# EAGLE board Lamp Logic Board_3 (EAGLE 9.4.2)
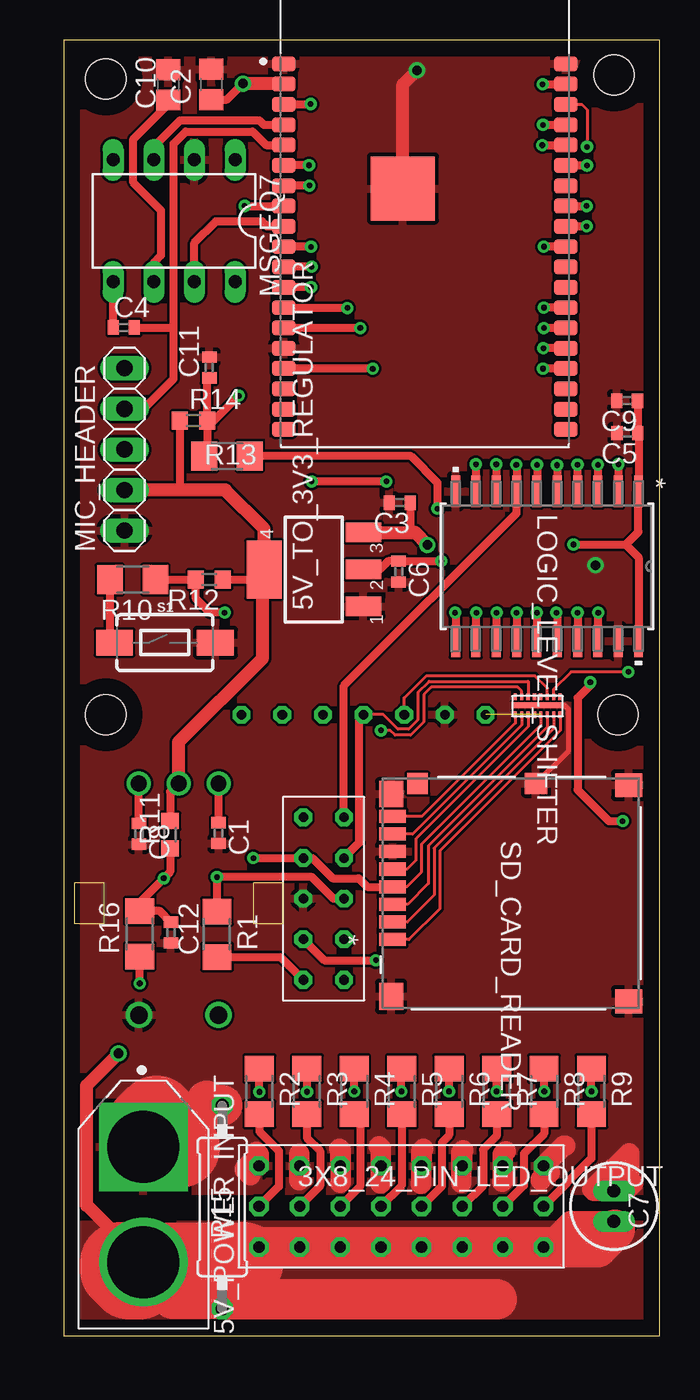
[diagram p0: board, top side]
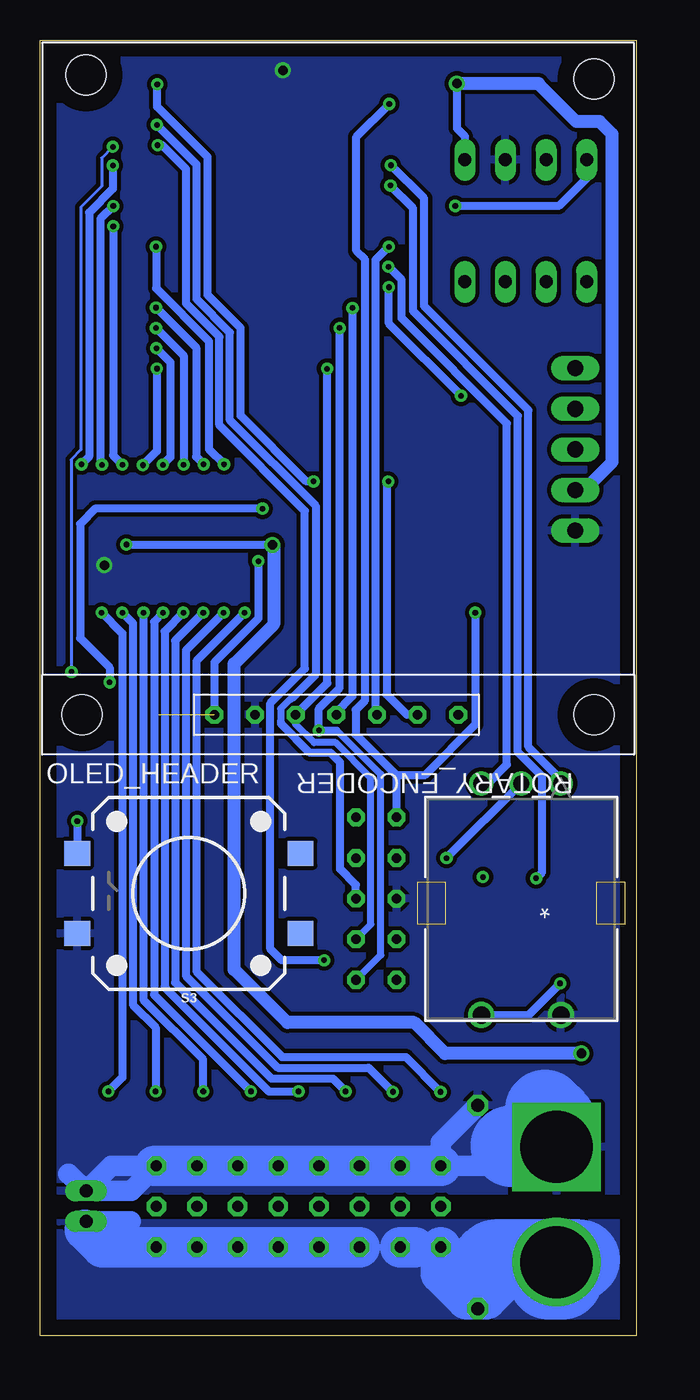
[diagram p1: board, bottom side, seen from below]

Size 37.25 x 81 mm. Coordinates in mm from the lower left corner, seen from the top.
Outline: 0,0 37.25,0 37.25,81 0,81 0,0
Copper layers (1*16): Top 0.035mm / dielectric 1.5mm / Bottom 0.035mm
Design rules "default": minimum track width 6mil, minimum drill 0.35mm, track to track 6mil, track to pad 6mil, pad to pad 6mil, via to via 6mil, smd to smd 6mil, copper to edge 40mil, drill to drill 6mil, minimum pad ring 10mil, minimum via ring 8mil, stop-mask expansion 4mil, vias tented up to drill 0mil, thermal gap 10mil

## Footprints (pad centres in the part's own frame; a part is rotated, then mirrored left to right if it is on the bottom)
3X8PINHEAD = drill 0.7 octagon: 1 0,0; 2 2.54,0; 3 5.08,0; 4 7.62,0; 5 10.16,0; 6 12.7,0; 7 15.24,0; 8 17.78,0; 9 0,-2.54; 10 2.54,-2.54; 11 5.08,-2.54; 12 7.62,-2.54; 13 10.16,-2.54; 14 12.7,-2.54; 15 15.24,-2.54; 16 17.78,-2.54; 17 0,-5.08; 18 2.54,-5.08; 19 5.08,-5.08; 20 7.62,-5.08; 21 10.16,-5.08; 22 12.7,-5.08; 23 15.24,-5.08; 24 17.78,-5.08
AMASS_XT60-M = drill 4.5 square: 1 -3.6,0 | drill 4.5: 2 3.6,0
SOT223 = smd 1.219 x 2.235: 1 -2.311,-3.099; 2 0,-3.099; 3 2.311,-3.099 | smd 3.6 x 2.2: 4 0,3.099
C0402 = smd 0.7 x 0.9: 1 -0.65,0; 2 0.65,0
C0805 = smd 1.3 x 1.5: 1 -0.95,0; 2 0.95,0
ENP2,0-5 = drill 0.813 pad 1.27 long: 1 -0.953,0; 2 0.953,0
DW20 = smd 1.981 x 0.559: 1 -4.686,5.715; 2 -4.686,4.445; 3 -4.686,3.175; 4 -4.686,1.905; 5 -4.686,0.635; 6 -4.686,-0.635; 7 -4.686,-1.905; 8 -4.686,-3.175; 9 -4.686,-4.445; 10 -4.686,-5.715; 11 4.686,-5.715; 12 4.686,-4.445; 13 4.686,-3.175; 14 4.686,-1.905; 15 4.686,-0.635; 16 4.686,0.635; 17 4.686,1.905; 18 4.686,3.175; 19 4.686,4.445; 20 4.686,5.715
1X05 = drill 1.016 long: 1 -5.08,0; 2 -2.54,0; 3 0,0; 4 2.54,0; 5 5.08,0
DIL-08 = drill 0.813 long: 1 -3.81,-3.81; 2 -1.27,-3.81; 3 1.27,-3.81; 4 3.81,-3.81; 5 3.81,3.81; 6 1.27,3.81; 7 -1.27,3.81; 8 -3.81,3.81
SPIOLED_STADOFF = drill 0.6 octagon: CLK 18.39,2.5; CS 20.93,2.5; DC 23.47,2.5; DIN 15.85,2.5; GND 13.31,2.5; RST 26.01,2.5; VCC 10.77,2.5 | hole 2.5: 2.5,2.5; 34.5,2.5; 34.5,42.25; 2.75,42.5
R1206 = smd 1.6 x 1.803: 1 -1.422,0; 2 1.422,0
R0603 = smd 1 x 1.1: 1 -0.85,0; 2 0.85,0
0309/12 = drill 0.813 octagon: 1 -6.35,0; 2 6.35,0
EN11-HSM = drill 0.991 pad 1.499: 1 -2.489,7.874; 2 2.489,7.874; 3 0,7.874 | drill 1.092 pad 1.6: 4 -2.489,22.352; 5 2.489,22.352
TACTILE_SWITCH_SMD_6.0X3.5MM = smd 2.3 x 1.6: 1 -3.15,0; 2 3.15,0
TACTILE_SWITCH_SMD_12MM = smd 1.6 x 1.55: 1 6.975,-2.5; 2 -6.975,-2.5; 3 6.975,2.5; 4 -6.975,2.5
CM1624-08DE = smd 0.2 x 0.4: CLK 1,0; CMD 2.2,0; DATA0 0.6,0; DATA1 0.2,0; DATA2 3,0; DATA3 2.6,0; ESD1 1.4,0; ESD2 1.4,1.125; ESD3 1.775,1.125; SDCLK 1,1.125; SDCMD 2.2,1.125; SDDATA0 0.6,1.125; SDDATA1 0.2,1.125; SDDATA2 3,1.125; SDDATA3 2.6,1.125; VCC 1.8,0 | smd 3 x 0.35: GND 1.575,0.575
CON00218_8 = smd 0.813 x 1.676: 1 2.899,-7.387; 2 1.799,-7.387; 3 0.699,-7.387; 4 -0.401,-7.387; 5 -1.501,-7.387; 6 -2.601,-7.387; 7 -3.701,-7.387; 8 -4.801,-7.387 | smd 1.499 x 1.702: 9 -6.751,7.374; 10 6.751,7.374 | smd 1.295 x 1.397: 11 -6.859,1.577 | smd 1.295 x 1.295: 12 -6.859,-5.823 | smd 1.6 x 1.499: 13 -6.201,-7.476 | smd 1.702 x 1.499: 14 6.449,-7.476
2X6PINHEAD = drill 0.6 octagon: CS 6.35,3.81; DTR 1.27,1.27; GND 6.35,1.27; MISO 11.43,3.81; MOSI 8.89,3.81; RTS 1.27,3.81; RX0 8.89,1.27; SCK 3.81,3.81; TX0 11.43,1.27; VCC 3.81,1.27
XCVR_ESP32-WROVER-I = smd 1.45 x 0.93: 1 -8.81,8.26; 2 -8.81,6.99; 3 -8.81,5.72; 4 -8.81,4.45; 5 -8.81,3.18; 6 -8.81,1.91; 7 -8.81,0.64; 8 -8.81,-0.63; 9 -8.81,-1.9; 10 -8.81,-3.17; 11 -8.81,-4.44; 12 -8.81,-5.71; 13 -8.81,-6.98; 14 -8.81,-8.25; 15 -8.81,-9.52; 16 -8.81,-10.79; 17 -8.81,-12.06; 18 -8.81,-13.33; 19 -8.81,-14.6; 20 8.81,-14.6; 21 8.81,-13.33; 22 8.81,-12.06; 23 8.81,-10.79; 24 8.81,-9.52; 25 8.81,-8.25; 26 8.81,-6.98; 27 8.81,-5.71; 28 8.81,-4.44; 29 8.81,-3.17; 30 8.81,-1.9; 31 8.81,-0.63; 32 8.81,0.64; 33 8.81,1.91; 34 8.81,3.18; 35 8.81,4.45; 36 8.81,5.72; 37 8.81,6.99; 38 8.81,8.26 | smd 4 x 4: 39 -1.38,0.47

## Placement (x,y rotation side)
3X8_24_PIN_LED_OUTPUT  3X8PINHEAD  [3X8PINHEAD]  12.2,10.62 0 top
5V_POWER_INPUT  XT60-M  [AMASS_XT60-M]  4.97,8.2 270 top
5V_TO_3V3_REGULATOR  [SOT223]  15.62,47.9 90 top
C1  0.01uF  [C0402]  9.68,31.43 270 top
C2  0.1uF  [C0805]  9.22,78.22 90 top
C3  1uF  [C0402]  21,52.08 180 top
C4  0.01uF  [C0402]  3.75,63.02 0 top
C5  100nF  [C0402]  35.23,56.42 180 top
C6  1uF  [C0402]  20.93,47.77 270 top
C7  1000uF  [ENP2,0-5]  34.38,8.1 270 top
C8  0.01uF  [C0402]  4.7,31.38 270 top
C9  1uF  [C0402]  35.2,58.45 180 top
C10  0.1uF  [C0805]  6.53,78.2 90 top
C11  100nF  [C0402]  9.1,60.52 90 top
C12  100nF  [C0402]  6.7,25.2 90 top
LOGIC_LEVEL_SHIFTER  SN74HCT245DWR  [DW20]  30.2,48.1 270 top
MIC_HEADER  [1X05]  3.8,55.41 90 top
MSGEQ7  MSGEQ7DIL  [DIL-08]  6.89,69.69 180 top
OLED_HEADER  SPIOLED_STANDOFF  [SPIOLED_STADOFF]  37.12,36.33 0 bottom
R1  330  [R1206]  9.57,25.1 270 top
R2  330  [R1206]  12.22,15.28 270 top
R3  330  [R1206]  15.19,15.28 270 top
R4  330  [R1206]  18.15,15.28 270 top
R5  330  [R1206]  21.12,15.28 270 top
R6  330  [R1206]  24.08,15.28 270 top
R7  330  [R1206]  27.05,15.28 270 top
R8  330  [R1206]  30.01,15.28 270 top
R9  330  [R1206]  32.97,15.28 270 top
R10  330  [R1206]  4.3,47.27 180 top
R11  [R0603]  6.65,31.32 90 top
R12  12k  [R0603]  9.1,47.27 180 top
R13  330  [R1206]  10.2,55 0 top
R14  12k  [R0603]  8.11,57.2 0 top
R15  75k  [0309/12]  9.9,8.05 270 top
R16  330  [R1206]  4.75,25.12 90 top
ROTARY_ENCODER  EN11-HSM1AF15  [EN11-HSM]  7.18,42.41 180 bottom
S1  [TACTILE_SWITCH_SMD_6.0X3.5MM]  6.33,43.33 0 top
S3  MOMENTARY-SWITCH-SPST-SMD-12MM  [TACTILE_SWITCH_SMD_12MM]  27.95,27.65 180 bottom
SD_CARD_FILTER  CM1624-08DE  [CM1624-08DE]  28.02,38.83 0 top
SD_CARD_READER  LLC  [CON00218_8]  27.93,27.66 270 top
SERIAL/SPI_HEADER  2X6PINHEAD  [2X6PINHEAD]  13.7,33.67 270 top
U1  ESP32-WROVER-IB  [XCVR_ESP32-WROVER-I]  22.57,71.25 0 top

## Library data of the parts
3X8_24_PIN_LED_OUTPUT = 3X8PINHEAD
5V_POWER_INPUT = XT60-M; AVAILABILITY: Unavailable; MF: AMASS; MP: XT60-M; PACKAGE: Package Analog Devices; PRICE: None
5V_TO_3V3_REGULATOR = lm1117; MF: Texas Instruments; MPN: LM1117MP-1.8; OC_FARNELL: 1469053; OC_NEWARK: 41K3467
C1-C6 C8-C12 R1-R16 = resistor
C7 = cap-pan40
LOGIC_LEVEL_SHIFTER = SN74HCT245DWR ; MANUFACTURER_PART_NUMBER: SN74HCT245DWR; VENDOR: Texas Instruments
MIC_HEADER = pinhead
MSGEQ7 = MSGEQ7; DESCRIPTION: Seven Band Graphic Equalizer Display Filter; DIGI-KEY_PART_NUMBER: 1568-1544-ND; DIGI-KEY_PURCHASE_URL: https://www.digikey.com/product-detail/en/sparkfun-electronics/DEV-13116/1568-1544-ND/5764478?utm_source=snapeda&utm_medium=aggregator&utm_campaign=symbol; MF: SparkFun Electronics; MP: MSGEQ7; PACKAGE: SOIC-8 Mixed Signal Integration
OLED_HEADER = SPIOLED-STANDOFF
ROTARY_ENCODER = untitled
S1 = SparkFun-Switches; PROD_ID: SWCH-00815; SF_SKU: COM-08229
S3 = SparkFun-Switches; PROD_ID: SWCH-11967; SF_SKU: COM-12993
SD_CARD_FILTER = CM1624-08DE
SD_CARD_READER = 5027740891; MANUFACTURER_PART_NUMBER: LLC; VENDOR: Molex Connector Corporation
SERIAL/SPI_HEADER = 2X4PINHEAD
U1 = ESP32-WROVER-I; AVAILABILITY: Unavailable; DESCRIPTION: Module: combo; GPIO, I2C x2, I2S x2, SDIO, SPI x3, UART x3; U.FL; MF: Espressif Systems; MP: ESP32-WROVER-I; PACKAGE: Module Espressif Systems; PRICE: None

## Nets
AR: MIC_HEADER.5
BEST_BUTTON: C11.1 R13.1 R14.2 U1.12
EN: R10.1 R12.2 SERIAL/SPI_HEADER.DTR U1.3
GAIN: MIC_HEADER.3
GND: 3X8_24_PIN_LED_OUTPUT.1 3X8_24_PIN_LED_OUTPUT.2 3X8_24_PIN_LED_OUTPUT.3 3X8_24_PIN_LED_OUTPUT.4 3X8_24_PIN_LED_OUTPUT.5 3X8_24_PIN_LED_OUTPUT.6 3X8_24_PIN_LED_OUTPUT.7 3X8_24_PIN_LED_OUTPUT.8 5V_POWER_INPUT.1 5V_TO_3V3_REGULATOR.1 C1.2 C2.2 C3.2 C5.2 C6.2 C7.1 C8.2 C9.2 C10.2 C11.2 C12.1 LOGIC_LEVEL_SHIFTER.10 LOGIC_LEVEL_SHIFTER.19 MIC_HEADER.1 MSGEQ7.2 OLED_HEADER.GND R15.1 ROTARY_ENCODER.4 S1.2 S3.3 SD_CARD_FILTER.GND SD_CARD_READER.6 SD_CARD_READER.9 SD_CARD_READER.10 SD_CARD_READER.11 SD_CARD_READER.13 SD_CARD_READER.14 SERIAL/SPI_HEADER.GND U1.1 U1.15 U1.38 U1.39
HEADER_CS: R1.1 SERIAL/SPI_HEADER.CS U1.35
LEDS1_3V3: LOGIC_LEVEL_SHIFTER.2 U1.33
LEDS1_5V: 3X8_24_PIN_LED_OUTPUT.9 R2.2
LEDS2_3V3: LOGIC_LEVEL_SHIFTER.3 U1.31
LEDS2_5V: 3X8_24_PIN_LED_OUTPUT.10 R3.2
LEDS3_3V3: LOGIC_LEVEL_SHIFTER.4 U1.30
LEDS3_5V: 3X8_24_PIN_LED_OUTPUT.11 R4.2
LEDS4_3V3: LOGIC_LEVEL_SHIFTER.5 U1.23
LEDS4_5V: 3X8_24_PIN_LED_OUTPUT.12 R5.2
LEDS5_3V3: LOGIC_LEVEL_SHIFTER.6 U1.24
LEDS5_5V: 3X8_24_PIN_LED_OUTPUT.13 R6.2
LEDS6_3V3: LOGIC_LEVEL_SHIFTER.7 SERIAL/SPI_HEADER.RTS U1.25
LEDS6_5V: 3X8_24_PIN_LED_OUTPUT.14 R7.2
LEDS7_3V3: LOGIC_LEVEL_SHIFTER.8 U1.26
LEDS7_5V: 3X8_24_PIN_LED_OUTPUT.15 R8.2
LEDS8_3V3: LOGIC_LEVEL_SHIFTER.9 U1.29
LEDS8_5V: 3X8_24_PIN_LED_OUTPUT.16 R9.2
MIC: C4.2 MIC_HEADER.4 U1.5
MISO: SD_CARD_FILTER.SDDATA0 SERIAL/SPI_HEADER.MISO U1.14
MOSI: OLED_HEADER.DIN SD_CARD_FILTER.SDCMD SERIAL/SPI_HEADER.MOSI U1.16
MSGEQ_OUT: MSGEQ7.3 U1.4
MSGEQ_RST: MSGEQ7.7 U1.9
MSGEQ_STROBE: MSGEQ7.4 U1.8
N$1: LOGIC_LEVEL_SHIFTER.18 R9.1
N$3: C4.1 MSGEQ7.5
N$4: C10.1 MSGEQ7.6
N$5: R16.1 ROTARY_ENCODER.5
N$6: LOGIC_LEVEL_SHIFTER.17 R8.1
N$7: R13.2 S3.1
N$8: SD_CARD_FILTER.ESD1
N$9: R10.2 S1.1
N$10: LOGIC_LEVEL_SHIFTER.16 R7.1
N$11: LOGIC_LEVEL_SHIFTER.15 R6.1
N$12: LOGIC_LEVEL_SHIFTER.14 R5.1
N$13: LOGIC_LEVEL_SHIFTER.13 R4.1
N$14: LOGIC_LEVEL_SHIFTER.12 R3.1
N$15: LOGIC_LEVEL_SHIFTER.11 R2.1
OLED_CS: OLED_HEADER.CS U1.10
OLED_DC: OLED_HEADER.DC U1.37
OLED_RESET: OLED_HEADER.RST
ROTARY_BUTTON_OUT: C12.2 R11.1 R16.2 U1.7
ROTARY_OUT_A: C8.1 ROTARY_ENCODER.1 U1.6
ROTARY_OUT_B: C1.1 ROTARY_ENCODER.2 U1.11
RX0: SERIAL/SPI_HEADER.RX0 U1.34
SCK: OLED_HEADER.CLK SD_CARD_FILTER.SDCLK SERIAL/SPI_HEADER.SCK U1.13
SD_CMD: SD_CARD_FILTER.CMD SD_CARD_READER.3
SD_CS: SD_CARD_FILTER.SDDATA3 U1.36
SD_D0: SD_CARD_FILTER.DATA0 SD_CARD_READER.7
SD_D1: SD_CARD_FILTER.DATA1 SD_CARD_READER.8
SD_D2: SD_CARD_FILTER.DATA2 SD_CARD_READER.1
SD_D3: SD_CARD_FILTER.DATA3 SD_CARD_READER.2
SD_SCK: SD_CARD_FILTER.CLK SD_CARD_READER.5
TX0: R1.2 SERIAL/SPI_HEADER.TX0
VDD3V3: 5V_TO_3V3_REGULATOR.2 5V_TO_3V3_REGULATOR.4 C2.1 C6.1 MIC_HEADER.2 MSGEQ7.1 OLED_HEADER.VCC R11.2 R12.1 R14.1 ROTARY_ENCODER.3 SD_CARD_FILTER.VCC SD_CARD_READER.4 SERIAL/SPI_HEADER.VCC U1.2
VDD5V: 3X8_24_PIN_LED_OUTPUT.17 3X8_24_PIN_LED_OUTPUT.18 3X8_24_PIN_LED_OUTPUT.19 3X8_24_PIN_LED_OUTPUT.20 3X8_24_PIN_LED_OUTPUT.21 3X8_24_PIN_LED_OUTPUT.22 3X8_24_PIN_LED_OUTPUT.23 3X8_24_PIN_LED_OUTPUT.24 5V_POWER_INPUT.2 5V_TO_3V3_REGULATOR.3 C3.1 C5.1 C7.2 C9.1 LOGIC_LEVEL_SHIFTER.1 LOGIC_LEVEL_SHIFTER.20 R15.2

## Tracks (layer width: path | path; a pad name or v marks a point on that pad's centre or on a via)
BEST_BUTTON  (via drill 0.35)
  Top 0.508: v15.45,65.55 v15.44,65.54 U1.12 | R14.2 8.96,55.18 R13.1 | R14.2 9.38,57.2 v10.94,58.76 | R14.2 8.96,59.73 C11.1
  Bottom 0.508: v10.94,58.76 15.45,63.27 v15.45,65.55
EN  (via drill 0.35)
  Top 0.508: U1.3 15.39,76.97 v15.43,77 | R10.1 R12.2 8.25,46.08 9.12,45.2 v10.05,45.2
  Bottom 0.508: 14.97,35.03 SERIAL/SPI_HEADER.DTR 14.95,32.41 | 14.97,35.03 17.52,37.59 17.52,39.12 16.93,39.72 16.93,67.25 17.48,67.8 17.48,74.95 v15.43,77 | v10.05,45.2 10.05,38.2 13.22,35.03 14.97,35.03
GND  (via drill 0.6)
  Top 0.305: 30,35.02 SD_CARD_READER.11 31.55,36.56 31.55,39.16 31.3,39.41 SD_CARD_FILTER.GND 29.61,39.38
  Top 0.813: U1.39 21.18,78.21 v22.07,79.1
  Top 1.27: 12.04,11.49 12.2,11.33 3X8_24_PIN_LED_OUTPUT.1 11.47,10.62 11.3,10.45 11.3,10.38 11.65,10.03 | 3X8_24_PIN_LED_OUTPUT.3 17.28,11.64 | 17.28,11.64 17.23,11.7 | 3X8_24_PIN_LED_OUTPUT.4 19.82,11.71 | 19.82,11.71 19.68,11.85 | 3X8_24_PIN_LED_OUTPUT.5 22.36,11.59 | 22.36,11.59 22.45,11.68 | 3X8_24_PIN_LED_OUTPUT.6 24.9,11.55 | 24.95,11.6 24.9,11.55 | 27.62,11.53 27.44,11.34 3X8_24_PIN_LED_OUTPUT.7 27.44,9.66 27.4,9.62 | 3X8_24_PIN_LED_OUTPUT.8 31.23,11.88 31.35,11.88 | 3X8_24_PIN_LED_OUTPUT.8 30.38,10.23 30.38,10.18 | 3X8_24_PIN_LED_OUTPUT.8 29.98,9.96 29.79,9.77 29.79,9.72 | C7.1 35.35,10.03 35.35,11.4 34.38,10.43 34.27,10.43 33.01,9.16 33.12,9.05 C7.1 | 3X8_24_PIN_LED_OUTPUT.2 14.72,10.61 | 14.72,9.72 14.72,10.61 | 14.72,11.38 14.72,10.61 | 17.28,11.64 17.3,11.62 17.3,9.58 17.27,9.55 | 19.82,11.71 19.8,11.69 19.8,9.54 19.78,9.52 | 22.36,11.59 22.32,11.55 22.32,9.52 22.31,9.51 | 24.9,11.55 24.82,11.47 24.82,9.57 | C7.1 35.13,9.05 35.6,9.53
  Top 2.54: R15.1 9.22,14.4 8.95,14.68
  Top 5: 7.25,11.75 7.2,11.8 5V_POWER_INPUT.1 4.97,12.95 5.8,13.78
  Bottom 1.27: 3X8_24_PIN_LED_OUTPUT.2 3X8_24_PIN_LED_OUTPUT.3 3X8_24_PIN_LED_OUTPUT.4 3X8_24_PIN_LED_OUTPUT.5 3X8_24_PIN_LED_OUTPUT.6 3X8_24_PIN_LED_OUTPUT.7 | 3X8_24_PIN_LED_OUTPUT.7 3X8_24_PIN_LED_OUTPUT.8 31.55,9.05 C7.1 | R15.1 12.2,12.1 3X8_24_PIN_LED_OUTPUT.1 6.15,10.62 5V_POWER_INPUT.1 | C7.1 32.8,10.62 30.07,10.62 3X8_24_PIN_LED_OUTPUT.7 | C7.1 35.45,10.12 35.48,10.12
  Bottom 2.54: 3X8_24_PIN_LED_OUTPUT.1 30.07,10.62 | 7.3,11.8 5V_POWER_INPUT.1
  Bottom 5: 7.85,11.9 7.75,11.8 5V_POWER_INPUT.1 4.97,13.4 5.7,14.12
  other vias: 33.23,48.17
  pour Bottom (isolate 0.254): -8,94.8 -8,94.41 -7.7,9.07 52.98,9.07 52.98,94.37
  pour Top (isolate 0.12): -12.43,9.05 53.02,9.05 53.02,88.92 -12.43,88.92
HEADER_CS  (via drill 0.35)
  Top 0.508: R1.1 v9.57,28.68 15.5,28.68 16.85,27.32 SERIAL/SPI_HEADER.CS | v29.95,75.7 U1.35
  Bottom 0.45: 21.52,39.85 21.62,39.76 21.66,39.76 22.21,39.21 22.21,38.44 22.19,38.42 22.19,38.33
  Bottom 0.508: v29.95,75.7 27.46,73.22 27.46,64.81 25.38,62.72 25.38,57.24 20.03,51.89 20.03,41.34 21.52,39.85 | SERIAL/SPI_HEADER.CS 17.51,28.18 18.5,29.18 18.5,35.85 19.09,36.44 20.39,36.44 22.19,38.25 22.19,38.33
LEDS1_3V3  (via drill 0.35)
  Top 0.508: LOGIC_LEVEL_SHIFTER.2 v34.65,54.47 v34.66,54.48 | U1.33 v32.7,73.16
  Bottom 0.508: v32.7,73.16 32.7,71.7 34.19,70.22 34.19,54.95 v34.66,54.48
LEDS1_5V
  Top 0.508: 3X8_24_PIN_LED_OUTPUT.9 13.45,9.34 13.45,11.55 12.22,12.78 R2.2
LEDS2_3V3  (via drill 0.35)
  Top 0.508: U1.31 v32.67,70.62 | v33.38,54.45 LOGIC_LEVEL_SHIFTER.3
  Bottom 0.508: v32.67,70.62 33.48,69.82 33.48,54.55 v33.38,54.45
LEDS2_5V
  Top 0.508: R3.2 15.19,12.39 16.02,11.55 16.02,9.37 3X8_24_PIN_LED_OUTPUT.10
LEDS3_3V3  (via drill 0.35)
  Top 0.508: U1.30 v32.67,69.35 | v32.1,54.45 LOGIC_LEVEL_SHIFTER.4
  Bottom 0.508: v32.67,69.35 32.67,55.02 v32.1,54.45
LEDS3_5V
  Top 0.508: R4.2 18.52,13.48 18.52,9.33 3X8_24_PIN_LED_OUTPUT.11
LEDS4_3V3  (via drill 0.35)
  Top 0.508: U1.23 v29.95,60.46 | v30.82,54.42 30.82,52.8 LOGIC_LEVEL_SHIFTER.5
  Bottom 0.508: v29.95,60.46 29.95,55.3 v30.82,54.42
LEDS4_5V
  Top 0.508: 3X8_24_PIN_LED_OUTPUT.12 21.12,9.38 R5.2
LEDS5_3V3  (via drill 0.35)
  Top 0.508: U1.24 v29.98,61.73 | v29.57,54.45 29.57,52.8 LOGIC_LEVEL_SHIFTER.6
  Bottom 0.508: v29.98,61.73 29.1,60.85 29.1,54.92 v29.57,54.45
LEDS5_5V
  Top 0.508: 3X8_24_PIN_LED_OUTPUT.13 23.62,9.35 23.62,12.07 24.08,12.53 R6.2
LEDS6_3V3  (via drill 0.35)
  Top 0.508: U1.25 v30,63 | 28.27,54.6 v28.27,54.45 28.3,54.43 LOGIC_LEVEL_SHIFTER.7 28.3,51.42 17.51,40.63 SERIAL/SPI_HEADER.RTS
  Bottom 0.508: v30,63 28.27,61.27 v28.27,54.45
LEDS6_5V
  Top 0.508: 3X8_24_PIN_LED_OUTPUT.14 26.2,9.38 26.2,11.65 27.05,12.5 R7.2
LEDS7_3V3  (via drill 0.35)
  Top 0.508: U1.26 v30,64.27 | v27.02,54.48 LOGIC_LEVEL_SHIFTER.8
  Bottom 0.508: v30,64.27 27.5,61.77 27.5,54.95 v27.02,54.48
LEDS7_5V
  Top 0.508: 3X8_24_PIN_LED_OUTPUT.15 28.75,9.39 28.75,11.38 30.01,12.64 R8.2
LEDS8_3V3  (via drill 0.35)
  Top 0.508: U1.29 v30,68.08 | v25.75,54.48 LOGIC_LEVEL_SHIFTER.9
  Bottom 0.508: v30,68.08 30,65.47 26.7,62.17 26.7,55.42 v25.75,54.48
LEDS8_5V
  Top 0.508: 3X8_24_PIN_LED_OUTPUT.16 32.98,11.08 R9.2
MIC
  Top 0.508: U1.5 12.65,74.43 11.8,75.28 7.62,75.28 6.87,74.53 6.87,63.02 | MIC_HEADER.4 3.85,57.9 4.95,57.9 6.87,59.82 6.87,63.02 | C4.2 6.87,63.02
MISO  (via drill 0.35)
  Top 0.2: SD_CARD_FILTER.SDDATA0 28.61,40.3 28.36,40.55 22.98,40.55 22.5,40.08 22.5,38.38 21.67,37.54 20.7,37.54 20.4,37.84 v19.82,37.84
  Top 0.508: v18.52,63 U1.14
  Bottom 0.45: SERIAL/SPI_HEADER.MISO 15.95,23.8 15.95,35.09 18.7,37.84 v19.82,37.84
  Bottom 0.508: v18.52,63 18.52,40.5 19.82,39.2 v19.82,37.84
MOSI  (via drill 0.35)
  Top 0.2: SD_CARD_FILTER.SDCMD 30.21,40.48 29.45,41.26 22.66,41.26 21.27,39.87 OLED_HEADER.DIN
  Top 0.508: v19.31,60.45 U1.16
  Bottom 0.45: OLED_HEADER.DIN 21.27,38.23 20.12,37.08 18.79,37.08 16.58,34.87 16.58,25.72 SERIAL/SPI_HEADER.MOSI
  Bottom 0.508: v19.31,60.45 v19.3,60.44 19.3,40.8 OLED_HEADER.DIN 21.27,38.45
MSGEQ_OUT
  Top 0.508: MSGEQ7.3 5.62,74.33 7.28,75.97 12.22,75.97 12.5,75.7 U1.4
MSGEQ_RST
  Top 0.508: MSGEQ7.7 8.16,68.33 9.49,69.65 12.4,69.65 12.71,69.35 U1.9
MSGEQ_STROBE  (via drill 0.35)
  Top 0.508: U1.8 13.05,70.62 v11.3,70.62
  Bottom 0.508: MSGEQ7.4 3.08,72.38 4.83,70.62 v11.3,70.62
N$1  (via drill 0.35)
  Top 0.508: v33.4,45.2 33.38,45.17 LOGIC_LEVEL_SHIFTER.18 | v32.98,15.28 R9.1 | R9.1
  Bottom 0.508: v33.4,45.2 32.1,43.91 32.1,16.14 v32.98,15.28
N$3
  Top 0.508: C4.1 3.08,63.04 MSGEQ7.5
N$4
  Top 0.508: C10.1 6.53,76.97 4.35,74.8 4.35,72.08 6.08,70.36 6.08,67.53 5.62,67.08 MSGEQ7.6
N$5  (via drill 0.35)
  Top 0.508: v4.75,22.02 R16.1
  Bottom 0.508: ROTARY_ENCODER.5 6.72,20.05 v4.75,22.02
N$6  (via drill 0.35)
  Top 0.508: LOGIC_LEVEL_SHIFTER.17 v32.1,45.2 | v30.02,15.28 30.02,16.68 R8.1
  Bottom 0.508: v32.1,45.2 31.45,44.54 31.45,20.7 30.02,19.27 v30.02,15.28
N$7  (via drill 0.35)
  Top 0.508: R13.2 11.65,54.98 21.7,54.98 23.35,53.33 v23.35,51.7 | v32.9,40.85 32.9,40.66 32.1,39.87 32.1,34.13 34.06,32.17 v34.92,32.17
  Bottom 0.508: v32.9,40.85 32.9,41.77 34.75,43.62 34.75,50.75 33.8,51.7 v23.35,51.7 | v34.92,32.17 S3.1
N$9
  Top 0.508: 3.43,43.58 S1.1 2.88,43.62 R10.2
N$10  (via drill 0.35)
  Top 0.508: 30.82,43.4 LOGIC_LEVEL_SHIFTER.16 30.84,45.15 v30.79,45.2 | v27.05,15.28 R7.1
  Bottom 0.508: v30.78,45.2 v30.79,45.2 30.79,44.81 30.78,44.81 30.78,21.01 27.05,17.27 v27.05,15.28
N$11  (via drill 0.35)
  Top 0.508: 29.57,43.4 LOGIC_LEVEL_SHIFTER.15 v29.57,45.2 | v24.07,15.28 R6.1
  Bottom 0.508: v29.57,45.2 30.12,44.64 30.12,21.32 v24.07,15.28
N$12  (via drill 0.35)
  Top 0.508: LOGIC_LEVEL_SHIFTER.14 v28.3,45.2 | v21.1,15.28 21.1,16.68 R5.1
  Bottom 0.508: v28.3,45.2 29.46,44.03 29.46,21.79 22.95,15.28 v21.1,15.28
N$13  (via drill 0.35)
  Top 0.508: LOGIC_LEVEL_SHIFTER.13 27.02,45.17 v27.05,45.2 | v18.15,15.28 R4.1
  Bottom 0.508: v27.05,45.2 28.8,43.45 28.8,22.09 22.79,16.07 18.95,16.07 v18.15,15.28
N$14  (via drill 0.35)
  Top 0.508: 25.77,43.39 LOGIC_LEVEL_SHIFTER.12 25.75,45.17 v25.78,45.2 | v15.2,15.25 15.2,16.69 R3.1
  Bottom 0.508: v25.78,45.2 28.14,42.84 28.14,22.51 22.39,16.76 16.71,16.76 v15.2,15.25
N$15  (via drill 0.35)
  Top 0.508: LOGIC_LEVEL_SHIFTER.11 24.48,45.17 v24.46,45.2 | v12.22,15.25 R2.1
  Bottom 0.508: v24.46,45.2 27.48,42.18 27.48,22.79 22.12,17.42 14.39,17.42 v12.22,15.25
OLED_CS  (via drill 0.35)
  Top 0.508: v15.45,68.08 U1.10
  Bottom 0.508: OLED_HEADER.CS 16.27,38.9 16.27,67.25 v15.45,68.08
OLED_DC  (via drill 0.35)
  Top 0.508: v20.16,53.4 v15.48,53.4 | v29.93,78.22 29.94,78.24 U1.37
  Bottom 0.508: OLED_HEADER.DC 14.33,38.83 15.59,40.08 15.59,53.3 v15.48,53.4 | v20.16,53.4 20.61,53.4 24.72,57.51 24.72,63 26.78,65.06 26.78,73.68 29.93,76.83 v29.93,78.22
ROTARY_BUTTON_OUT  (via drill 0.35)
  Top 0.508: R11.1 6.65,29 v6.25,28.6 4.75,27.1 R16.2 6,26.55 C12.2 | v15.35,71.9 v15.34,71.89 U1.7
  Bottom 0.508: v6.25,28.6 5.88,28.98 5.88,34.98 7.38,36.49 7.38,57.5 13.94,64.05 13.94,70.48 v15.35,71.9
ROTARY_OUT_A  (via drill 0.35)
  Top 0.508: C8.1 ROTARY_ENCODER.1 | v15.32,73.17 v15.31,73.16 U1.6
  Bottom 0.508: v15.32,73.17 13.25,71.1 13.25,64.38 6.72,57.85 6.72,36.81 4.7,34.78 ROTARY_ENCODER.1
ROTARY_OUT_B  (via drill 0.35)
  Top 0.508: C1.1 ROTARY_ENCODER.2 | v15.48,66.83 13.77,66.83 U1.11
  Bottom 0.508: ROTARY_ENCODER.2 9.25,34.53 8.07,35.71 8.07,57.03 14.65,63.6 14.65,66.01 15.46,66.83 v15.48,66.83
RX0  (via drill 0.35)
  Top 0.508: U1.34 v29.9,74.42 | SERIAL/SPI_HEADER.RX0 16.28,23.48 v19.5,23.48
  Bottom 0.508: v29.9,74.42 29.63,74.42 28.12,72.92 28.12,64.53 26.04,62.45 26.04,56.91 20.69,51.57 20.69,41.71 22.85,39.55 22.85,24.18 22.15,23.48 v19.5,23.48
SCK  (via drill 0.35)
  Top 0.2: OLED_HEADER.CLK 19.98,38.83 20.88,37.92 21.55,37.92 22.12,38.5 22.12,40.2 22.83,40.9 29.02,40.9 SD_CARD_FILTER.SDCLK
  Top 0.508: v17.73,64.25 13.78,64.25 U1.13 | SERIAL/SPI_HEADER.SCK 18.48,30.83 18.48,38.56 OLED_HEADER.CLK
  Bottom 0.508: OLED_HEADER.CLK 18.73,38.98 17.73,39.98 v17.73,64.25
SD_CMD
  Top 0.2: SD_CARD_FILTER.CMD 30.21,38.06 22.79,30.63 22.79,28.27 21.49,26.97 SD_CARD_READER.3
SD_CS  (via drill 0.35)
  Top 0.2: SD_CARD_FILTER.SDDATA3 30.61,40.41 31.7,41.5 v35.28,41.5 | U1.36 32.38,76.97 32.7,76.65 v32.7,74.33
  Bottom 0.2: v35.28,41.5 35.31,41.52 35.31,54.77 34.69,55.38 34.69,70.56 33.4,71.85 33.4,73.62 v32.7,74.33
SD_D0
  Top 0.2: SD_CARD_FILTER.DATA0 28.61,38.18 21.8,31.37 SD_CARD_READER.7
SD_D1
  Top 0.2: 20.58,32.43 SD_CARD_READER.8 22.38,32.47 28.21,38.3 SD_CARD_FILTER.DATA1
SD_D2
  Top 0.2: SD_CARD_FILTER.DATA2 31.02,37.84 23.5,30.32 23.5,26.7 21.57,24.77 SD_CARD_READER.1
SD_D3
  Top 0.2: SD_CARD_FILTER.DATA3 30.61,37.96 23.14,30.49 23.14,27.54 21.47,25.87 SD_CARD_READER.2
SD_SCK
  Top 0.2: SD_CARD_FILTER.CLK 29.02,38.08 22,31.06 22,29.73 21.44,29.17 SD_CARD_READER.5
TX0
  Top 0.508: R1.2 13.53,23.68 14.96,22.25 SERIAL/SPI_HEADER.TX0
VDD3V3  (via drill 0.35, 0.6)  (1 unrouted)
  Top 0.2: SD_CARD_FILTER.VCC 29.82,38.18 22.35,30.72 22.35,28.98 21.44,28.07 SD_CARD_READER.4
  Top 0.508: ROTARY_ENCODER.3 6.65,34 R11.2 | 5V_TO_3V3_REGULATOR.2 19.75,47.9 20.27,48.42 C6.1 v23.6,48.42 | 20.65,28.07 SD_CARD_READER.4 18.96,28.07 18.43,28.6 16.8,28.6 15.54,29.86 SERIAL/SPI_HEADER.VCC v11.85,29.86 | 12.02,47.4 5V_TO_3V3_REGULATOR.4 | R12.1 11.9,47.27 5V_TO_3V3_REGULATOR.4 | C2.1 10.2,77.28 v11.2,78.28 | R14.1 7.26,52.94 7.33,52.87 | 5V_TO_3V3_REGULATOR.4 12.48,47.95
  Top 0.813: v11.2,78.28 13.72,78.28 U1.2 | 5V_TO_3V3_REGULATOR.4 12.53,48.97 | 5V_TO_3V3_REGULATOR.4 12.53,50.45 10.11,52.87 7.33,52.87 MIC_HEADER.2 | ROTARY_ENCODER.3 7.18,37.11 12.43,42.35 12.43,47.8 5V_TO_3V3_REGULATOR.4
  Bottom 0.508: OLED_HEADER.VCC 26.36,42.09 23.6,44.85 v23.6,48.42 | ROTARY_ENCODER.3 v11.85,29.86 | v11.2,78.28 11.2,75.47 10.71,74.98 MSGEQ7.1
  Bottom 0.813: 3.9,52.87 MIC_HEADER.2 3.25,52.87 1.5,54.62 1.5,75.12 2.27,75.9 3.73,75.9 6.1,78.28 v11.2,78.28
VDD5V  (via drill 0.35, 0.6)
  Top 0.508: 35.11,49.46 35.9,50.25 35.9,52.77 LOGIC_LEVEL_SHIFTER.1 35.91,56.38 C5.1 35.88,58.42 C9.1 | 35.11,49.46 35.91,48.66 LOGIC_LEVEL_SHIFTER.20 | v31.85,49.46 35.11,49.46 | 21.65,51.87 C3.1 21.64,50.52 v22.73,49.44
  Top 0.813: 5V_TO_3V3_REGULATOR.3 18.85,50.09 | 18.76,50.17 5V_TO_3V3_REGULATOR.3 | 5V_TO_3V3_REGULATOR.3 21.95,50.21 v22.72,49.44 v22.73,49.44 | v3.42,17.65 1.42,15.65 1.42,8.15 5V_POWER_INPUT.2
  Top 1.27: C7.2 31.62,7.15 30.02,5.54 3X8_24_PIN_LED_OUTPUT.24
  Top 2.54: 11.24,4.58 3X8_24_PIN_LED_OUTPUT.17 3X8_24_PIN_LED_OUTPUT.18 3X8_24_PIN_LED_OUTPUT.19 3X8_24_PIN_LED_OUTPUT.20 3X8_24_PIN_LED_OUTPUT.21 3X8_24_PIN_LED_OUTPUT.22 3X8_24_PIN_LED_OUTPUT.23 3X8_24_PIN_LED_OUTPUT.24 33.34,5.54 34.42,6.62 | 27.05,2.29 9.97,2.29 9.97,2.33 6.83,2.33
  Top 5: 11.24,4.58 11.22,4.6 5V_POWER_INPUT.2 3.54,4.6 3.52,4.58 3.52,4.11 4.11,3.52 4.7,3.52
  Bottom 0.508: 22.65,49.44 v22.73,49.44 22.75,49.46 v31.85,49.46
  Bottom 0.813: 22.65,49.44 22.65,44.48 25.12,42 25.12,22.9 21.8,19.57 13.88,19.57 11.95,17.65 v3.42,17.65
  Bottom 1.27: 31.58,7.15 C7.2 32.77,5.54 27.4,5.54
  Bottom 2.54: 5V_POWER_INPUT.2 7.05,4.6 9.36,2.29 10.59,2.29 12.2,3.9 3X8_24_PIN_LED_OUTPUT.17 | 13.85,5.54 3X8_24_PIN_LED_OUTPUT.18 | 3X8_24_PIN_LED_OUTPUT.19 27.4,5.54 3X8_24_PIN_LED_OUTPUT.24 33.37,5.54 34.45,6.62
  Bottom 5: 9.1,4.5 8.82,4.78 3.52,4.78 3.69,4.6 5V_POWER_INPUT.2 4.97,4.02 5.47,3.52 4.59,3.52
  pour Bottom (isolate 0.12): -8.86,7.03 45.73,7.03 45.73,-3.33 -8.96,-3.33
  pour Top (isolate 0.12): -12.07,6.97 45.88,6.97 45.88,-4.15 44.52,-5.5 -11.84,-5.5